# Altium PCB ArduinoUnoShield.PcbDoc
Units mm, origin at the board's own origin, x right, y up, seen from the top; angles counter-clockwise.
Board outline 68.58 x 53.34 mm, 2 copper layers (Top Layer, Bottom Layer); 49 components, 24 nets, 147 pads, 26 vias.
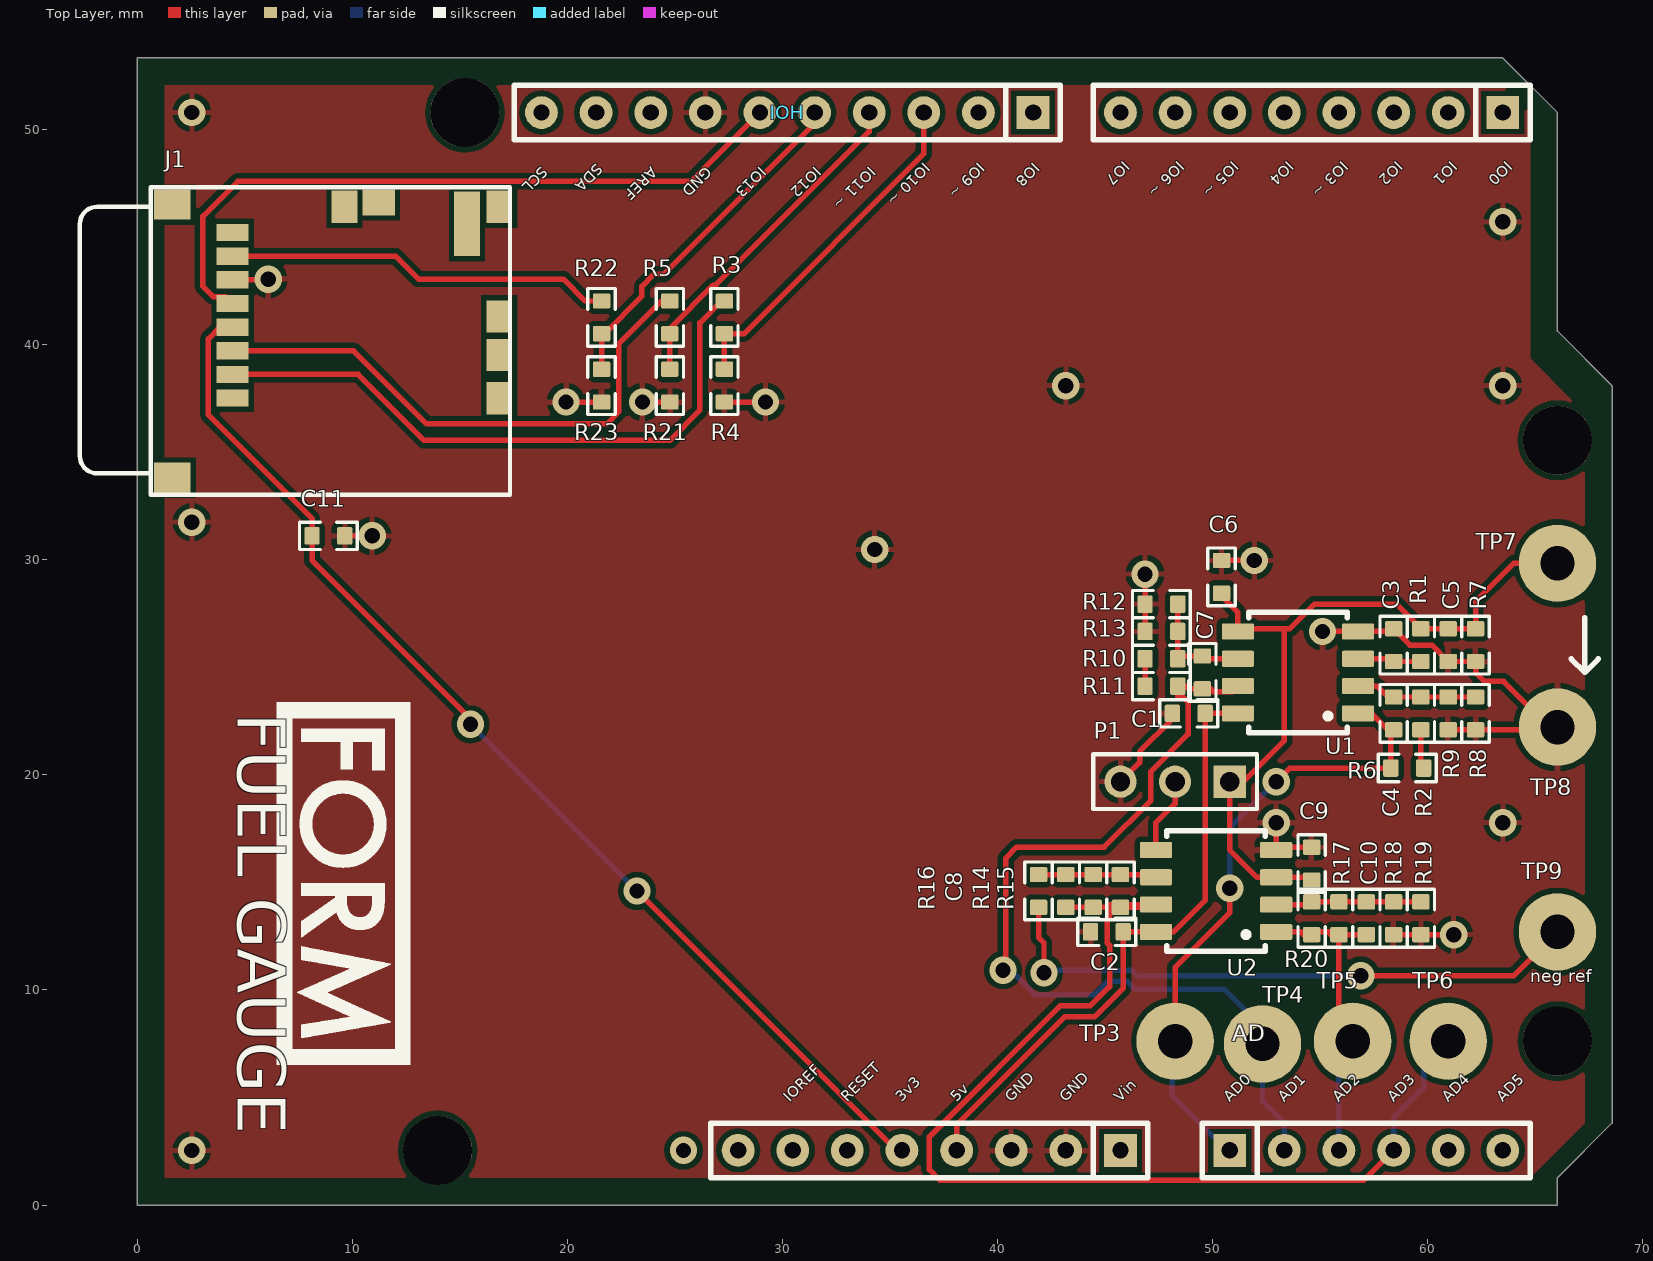
[diagram p0: Top Layer view]
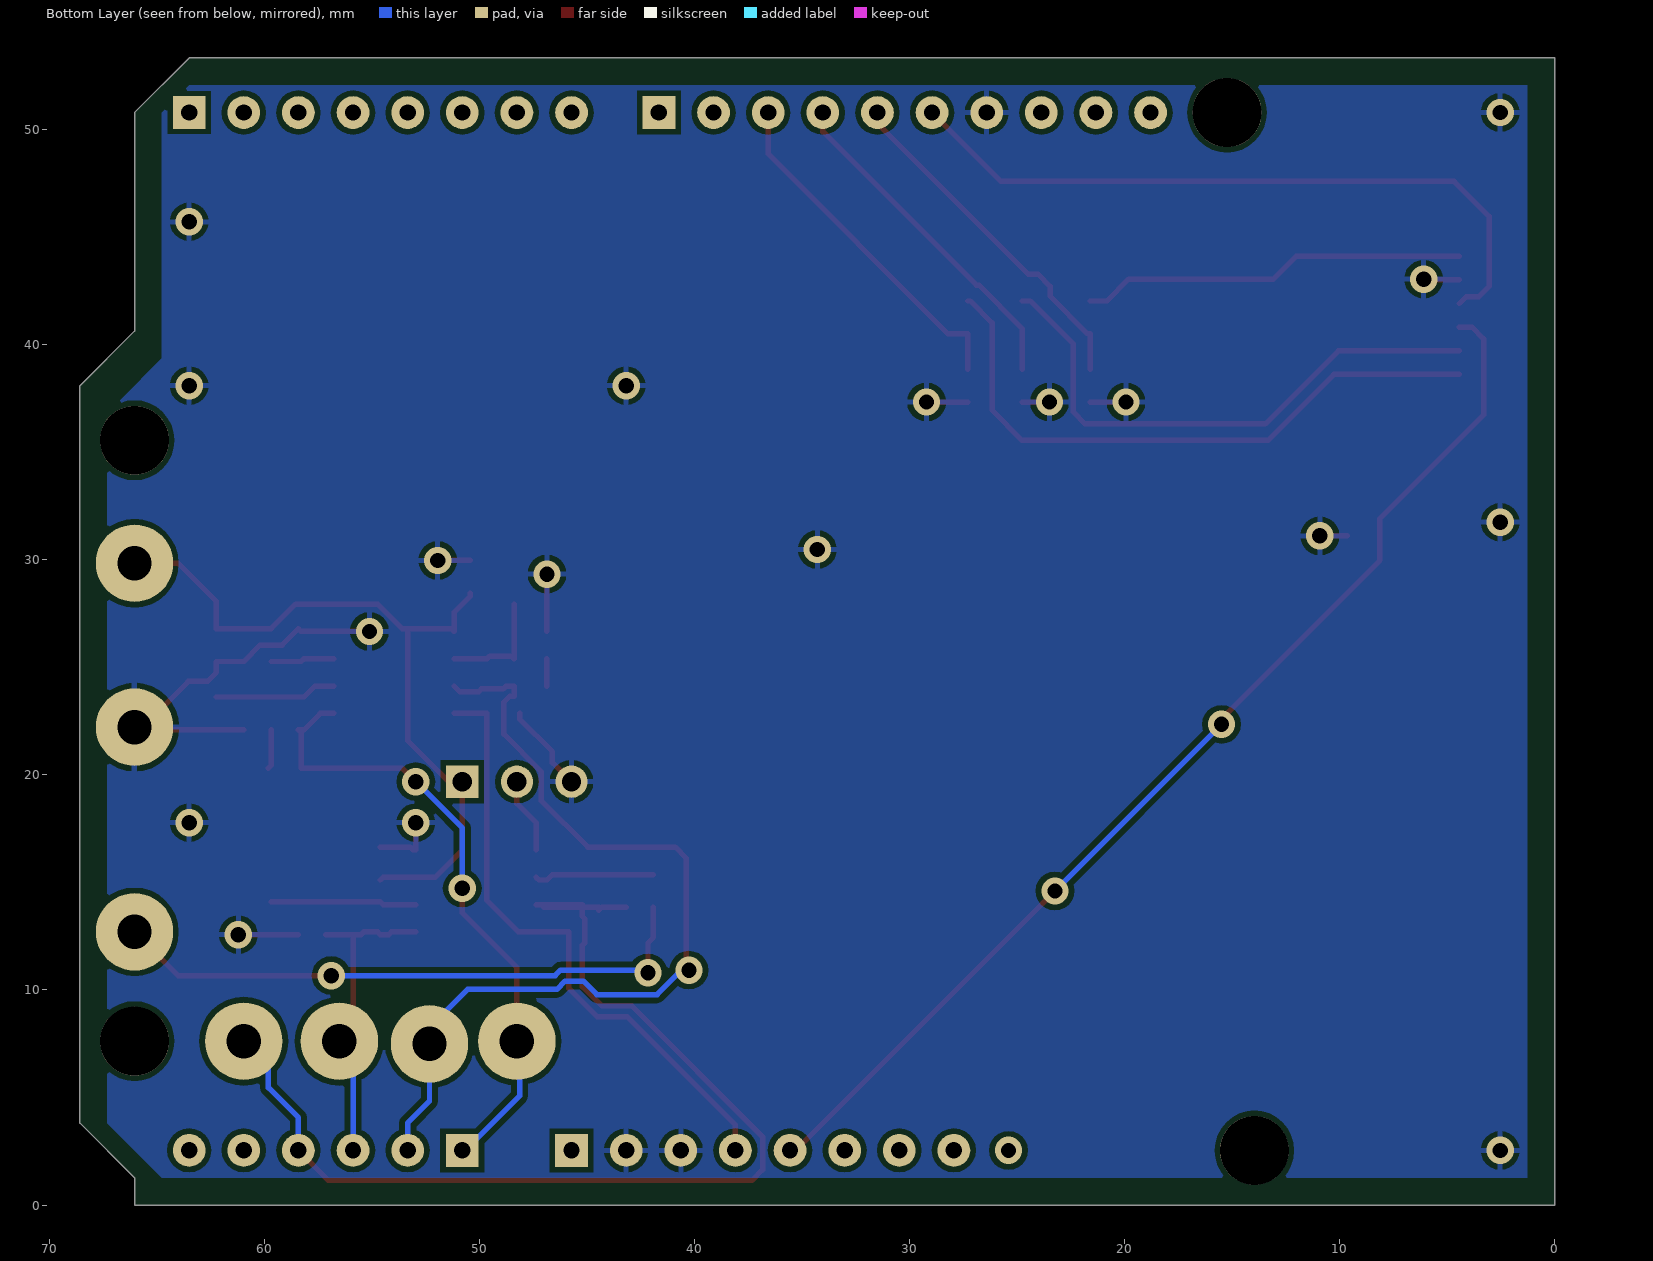
[diagram p1: Bottom Layer view, seen from below]

## Layer stack, top to bottom
Top Solder: solder mask 0.0102, Solder Resist, Dk 3.5
Top Layer: signal copper 0.0356
Dielectric1: dielectric 0.32, FR-4, Dk 4.8
Bottom Layer: signal copper 0.0356
Bottom Solder: solder mask 0.0102, Solder Resist, Dk 3.5

## Board outline
0,0 0,53.34 63.5,53.34 66.04,50.8 66.04,40.64 68.58,38.1 68.58,3.81 66.04,1.27 66.04,0

## Design rules (kind name [scope] priority, off if disabled: settings)
Clearance [All] p1: gap=0.254
PolygonConnect [All] p1: connectstyle=Relief reliefconductorwidth=0.254 reliefentries=4 polygonreliefangle="90 Angle" airgapwidth=0.254
RoutingVias [All] p1: holewidth=0.711 width=1.27 viastyle="Through Hole" minholewidth=0.711 minwidth=1.27 maxholewidth=0.711 maxwidth=1.27
SilkToSolderMaskClearance SilkscreenOverComponentPads [IsPad] p1: minsilkscreentomaskgap=0.254 clearancetoexposedcopper=TRUE
SolderMaskExpansion [All] p1: expansion=0.102
UnpouredPolygon [All] p1: allowunpoured=FALSE
Width [All] p1: maxlimit=0.254 minlimit=0.254 preferedwidth=0.254
28 further rules are at their usual default settings.

## Components (designator, comment, footprint, x,y, rotation, side; value= is the part's Value field where it differs from the comment)
AD "AD" "Header 6x1 8.5mm" 50.8,2.54 r0 top locked
C1 "CAP0603" 0603CAP 48.895,22.86 r0 top
C2 "CAP0603" 0603CAP 45.085,12.7 r0 top
C3 "CAP0603" 0603CAP 58.42,26.035 r90 top
C4 "CAP0603" 0603CAP 58.42,22.86 r270 top
C5 "CAP0603" 0603CAP 60.96,26.035 r270 top
C6 "CAP0603" 0603CAP 50.419,29.21 r90 top
C7 "CAP0603" 0603CAP 49.53,24.765 r270 top
C8 "CAP0603" 0603CAP 43.18,14.605 r270 top
C9 "CAP0603" 0603CAP 54.61,15.875 r90 top
C10 "CAP0603" 0603CAP 57.15,13.335 r270 top
C11 "CAP0603" 0603CAP 8.89,31.115 r180 top
IOH "IOH" "Header 10x1 8.5mm" 41.656,50.8 r180 top locked
IOL "IOL" "Header 8x1 8.5mm" 63.5,50.8 r180 top locked
J1 "MicroSD" "micro SD" 0.635,33.02 r90 top
P1 "Header 3" HDR1X3 50.8,19.685 r180 top
POWER "POWER_UNO" "Header 8x1 8.5mm" 45.72,2.54 r180 top locked
R1 "RES_STANDARD" RES0603 59.69,26.035 r270 top
R2 "RES_STANDARD" RES0603 59.69,22.86 r90 top
R3 "RES_STANDARD" RES0603 27.305,41.275 r90 top
R4 "RES_STANDARD" RES0603 27.305,38.1 r90 top
R5 "RES_STANDARD" RES0603 24.765,41.275 r90 top
R6 "RES_STANDARD" RES0603 59.055,20.32 r0 top
R7 "RES_STANDARD" RES0603 62.23,26.035 r90 top
R8 "RES_STANDARD" RES0603 62.23,22.86 r90 top
R9 "RES_STANDARD" RES0603 60.96,22.86 r90 top
R10 "RES_STANDARD" RES0603 47.625,25.4 r0 top
R11 "RES_STANDARD" RES0603 47.625,24.13 r180 top
R12 "RES_STANDARD" RES0603 47.625,27.94 r0 top
R13 "RES_STANDARD" RES0603 47.625,26.67 r0 top
R14 "RES_STANDARD" RES0603 44.45,14.605 r90 top
R15 "RES_STANDARD" RES0603 45.72,14.605 r90 top
R16 "RES_STANDARD" RES0603 41.91,14.605 r270 top
R17 "RES_STANDARD" RES0603 55.88,13.335 r90 top
R18 "RES_STANDARD" RES0603 58.42,13.335 r90 top
R19 "RES_STANDARD" RES0603 59.69,13.335 r90 top
R20 "RES_STANDARD" RES0603 54.61,13.335 r90 top
R21 "RES_STANDARD" RES0603 24.765,38.1 r90 top
R22 "RES_STANDARD" RES0603 21.59,41.275 r90 top
R23 "RES_STANDARD" RES0603 21.59,38.1 r90 top
TP3 "TESTPOINT_1.6MM" TESTPOINT_1.6MM 48.26,7.62 r90 top
TP4 "TESTPOINT_1.6MM" TESTPOINT_1.6MM 52.324,7.493 r90 top
TP5 "TESTPOINT_1.6MM" TESTPOINT_1.6MM 56.515,7.62 r90 top
TP6 "TESTPOINT_1.6MM" TESTPOINT_1.6MM 60.96,7.62 r90 top
TP7 "TESTPOINT_1.6MM" TESTPOINT_1.6MM 66.04,29.845 r90 top
TP8 "TESTPOINT_1.6MM" TESTPOINT_1.6MM 66.04,22.225 r90 top
TP9 "TESTPOINT_1.6MM" TESTPOINT_1.6MM 66.04,12.7 r90 top
U1 "OPA2335" SO8 53.975,24.765 r180 top
U2 "OPA2335" SO8 50.165,14.605 r180 top

## Footprints (in the part's own frame and the unit in brackets; to place one, negate y for a bottom-side part, rotate by r counter-clockwise, add the part's x,y. Pads: shape width x height; smd on the part's side, far side on the other; paste and mask are expansions set on the pad)
0603CAP [mil] "0603cap"
  rrect20% 28x32 smd mask+0: 1(-30,0) 2(30,0)
  silkscreen extent -53,-25 53,25, body extent -31,-16 31,16, height 20
HDR1X3 [mm] "Connector; Header; 3 Position"
  rect 1.5x1.5 hole 0.9: 1(0,0)
  round 1.5 hole 0.9: 2(2.54,0) 3(5.08,0)
  silkscreen extent -1.27,-1.27 6.35,1.27
"Header 6x1 8.5mm" [mil] "Stackable 6 pin header"
  rect 60x60 hole 30: 1(0,0)
  round 60 hole 30: 2(100,0) 3(200,0) 4(300,0) 5(400,0) 6(500,0)
  silkscreen extent -50,-50 550,50, body extent -50,-50 550,50, height 335
"Header 8x1 8.5mm" [mil] "Stackable 8 pin header"
  rect 60x60 hole 30: 1(0,0)
  round 60 hole 30: 2(100,0) 3(200,0) 4(300,0) 5(400,0) 6(500,0) 7(600,0) 8(700,0)
  silkscreen extent -50,-50 750,50, body extent -50,-50 750,50, height 335
"Header 10x1 8.5mm" [mil] "Stackable 10 pin header"
  rect 60x60 hole 30: 1(0,0)
  round 60 hole 30: 2(100,0) 3(200,0) 4(300,0) 5(400,0) 6(500,0) 7(600,0) 8(700,0) 9(800,0) 10(900,0)
  silkscreen extent -50,-50 950,50, body extent -50,-50 950,50, height 335
"micro SD" [mm] "Molex 502570 - http://www.molex.com/pdm_docs/sd/5025700893_sd.pdf"
  rect 0.8x1.5 smd: 1(4.5,-3.8) 2(5.6,-3.8) 3(6.7,-3.8) 4(7.8,-3.8) 5(8.9,-3.8) 6(10,-3.8) 7(11.1,-3.8) 8(12.2,-3.8)
  rect 1.2x1.5 smd: 9(13.6,-10.6)
  rect 1.5x1.2 smd: 10(6.5,-16.2) 13(4.5,-16.2) 14(13.4,-16.2) 15(8.3,-16.2) 17(13.4,-9)
  rect 1.4x1.7 smd: 11(0.8,-1) 12(13.5,-1)
  rect 3x1.2 smd: 16(12.6,-14.7)
  silkscreen extent 0,-16.7 14.3,3.3
RES0603 [mil] "RES0603"
  rrect20% 28x32 smd mask+0: 1(-30,0) 2(30,0)
  silkscreen extent -53,-25 53,25, body extent -30,-15 30,15, height 22
SO8 [mm] "SO8 (S8)"
  rrect20% 1.5x0.75 smd mask+0: 1(-2.794,1.905) 2(-2.794,0.635) 3(-2.794,-0.635) 4(-2.794,-1.905) 5(2.794,-1.905) 6(2.794,-0.635) 7(2.794,0.635) 8(2.794,1.905)
  silkscreen extent -2.29,-2.79 2.29,2.79, body extent -2.16,-2.67 2.16,2.67, height 1.76
TESTPOINT_1.6MM [mm] "Testpoint 1.6mm"
  round 3.6 hole 1.6 paste+0 mask+0: 1(0,0)
  body extent -0.81,-0.81 0.81,0.81, height 8.1

## Part data
C1 C2 C3 C4 C5 C6 C7 C8 C9 C10 C11: library part 185, "Ceramic Capacitor SMD 0603"
P1: "Header, 3-Pin"
R1 R2 R3 R4 R5 R6 R7 R8 R9 R10 R11 R12 R13 R14 R15 R16 R17 R18 R19 R20 R21 R22 R23: library part 276, "Resistor 0603 SMD"
TP3 TP4 TP5 TP6 TP7 TP8 TP9: library part 203, "Testpoint"
U1 U2: library part 104, "Dual and Quad 75 MHz GBW Rail-to-Rail I/O Operational"

## Free pads (board coordinates)
  round 3.2 hole 3.2: 0(13.97,2.54) 0(15.24,50.8) 0(66.04,7.62) 0(66.04,35.56)

## Via types
v1: diameter 1.27, hole 0.711, Top Layer to Bottom Layer, 26 vias

## Nets (pads, with @x,y where several pads share a name; then routed paths per layer and width w, separated by ;. In a path a pad name is that pad's centre, name@x,y a point inside that pad or via, vN(x,y) a via of type N, cw(c..) or ccw(c..) an arc to the next point about the centre after c; other vN are vias at no path point)
3.3V: C11.2 J1.4 POWER.5 | length 52.6
  Top Layer w0.254: J1.4 3.846,40.82 3.304,40.278 3.304,36.739 8.128,31.915 C11.2 8.128,29.972 15.494,22.606 v1(15.494,22.352) ; v1(23.241,14.605) 35.306,2.54 POWER.5
  Bottom Layer w0.254: v1(15.494,22.352) v1(23.241,14.605)
5V: C1.2 C2.2 POWER.4 U1.8 U2.8 | length 28.8
  Top Layer w0.254: POWER.4 38.1,3.727 43.136,8.763 44.533,8.763 45.847,10.077 C2.2 U2.8 48.197,12.7 49.657,14.16 C1.2 U1.8
AD0: AD.1 C4.2 R6.1 TP3.1 U1.1 | length 29.7
  Top Layer w0.254: TP3.1 48.26,11.049 50.8,13.589 v1(50.8,14.732) ; v1(52.959,19.685) 53.594,20.32 R6.1 58.293,21.971 C4.2 58.166,22.098 57.404,22.86 U1.1
  Bottom Layer w0.254: TP3.1 48.133,7.493 48.133,5.08 50.673,2.54 AD.1 ; v1(50.8,14.732) 50.8,17.526 v1(52.959,19.685)
AD1: AD.2 C7.2 R11.1 TP4.1 U1.7 | length 42.3
  Top Layer w0.254: v1(40.259,10.922) 40.386,11.049 40.386,16.129 40.894,16.637 44.958,16.637 47.129,18.808 47.129,20.153 48.87,21.894 48.87,23.383 48.605,23.647 48.387,23.647 R11.1 48.768,24.13 48.895,24.003 C7.2 49.911,24.003 50.038,23.876 50.927,23.876 U1.7
  Bottom Layer w0.254: v1(40.259,10.922) 40.6,10.922 41.743,9.779 44.537,9.779 45.172,10.414 46.014,10.414 46.395,10.033 50.546,10.033 52.324,8.255 TP4.1 52.324,4.826 53.34,3.81 AD.2
AD2: AD.3 C10.2 R17.1 R20.1 TP5.1 U2.1 | length 14.9
  Top Layer w0.254: U2.1 54.102,12.7 54.229,12.573 R20.1 54.737,12.7 55.372,12.7 55.499,12.573 R17.1 ; TP5.1 55.88,8.255 R17.1 ; C10.2 R17.1
  Bottom Layer w0.254: AD.3 55.88,6.985 TP5.1
AD3: AD.4 C8.2 R14.1 R15.1 TP6.1 U2.7 | length 53.1
  Top Layer w0.254: C8.2 44.323,13.843 44.45,13.716 R14.1 45.187,13.843 ; U2.7 U2.7@47.117,13.97 ; AD.4 57.023,1.143 37.338,1.143 36.83,1.651 36.83,3.175 42.926,9.271 44.323,9.271 45.212,10.16 45.212,12.076 45.11,12.177 45.11,13.324 45.212,13.426 45.212,13.716 45.187,13.741 45.187,13.843 ; TP6.1@59.599,7.62 TP6.1 ; 45.187,13.843 45.593,13.843 R15.1@45.72,13.97 ; 45.187,13.843 45.187,13.945 45.212,13.97 R15.1@45.72,13.97 ; R15.1@45.72,13.97 U2.7@47.117,13.97 ; R15.1@45.72,13.97 R15.1 46.99,13.843 U2.7@47.117,13.97
  Bottom Layer w0.254: AD.4 58.42,4.064 59.817,5.461 59.817,6.35 60.96,7.493 TP6.1
CS: J1.2 R3.2 | length 29.2
  Top Layer w0.254: J1.2 10.275,38.62 13.335,35.56 24.765,35.56 26.162,36.957 26.162,41.021 27.178,42.037 R3.2
GND: C1.1 C2.1 C3.2 C5.2 C6.2 C9.2 C11.1 IOH.7 J1.6 P1.3 POWER.2 POWER.3 R4.1 R7.1 R8.1 R9.1 R12.1 R13.1 R18.1 R19.1 R21.1 R23.1 TP8.1 U1.4 U2.4 | length 40.2
  Top Layer w0.254: J1.6 6.063,43.02 v1(6.096,43.053) ; C11.1 v1(10.922,31.115) ; v1(19.939,37.338) R23.1 ; v1(23.495,37.338) R21.1 ; R4.1 v1(29.21,37.338) ; P1.3 46.609,20.574 46.609,21.082 48.133,22.606 C1.1 ; R13.1 R12.1 v1(46.863,29.337) ; C6.2 v1(51.943,29.972) ; v1(52.959,17.78) U2.4 53.086,16.51 53.213,16.637 C9.2 ; v1(55.118,26.67) U1.4 58.293,26.67 C3.2 59.182,26.035 60.198,26.035 C5.2 R7.1 62.23,24.765 62.643,24.352 63.532,24.352 65.659,22.225 TP8.1 65.913,22.098 R8.1 R9.1 ; R18.1 R19.1 v1(61.214,12.573)
  other v1: 2.54,2.54 63.5,17.78 34.29,30.48 2.54,31.75 43.18,38.1 63.5,38.1 63.5,45.72 2.54,50.8
IO10: IOH.3 R3.1 R4.2 | length 16.3
  Top Layer w0.254: R4.2 R3.1 28.205,40.513 36.576,48.884 IOH.3
IO11: IOH.4 R5.1 R21.2 | length 15.8
  Top Layer w0.254: R21.2 R5.1 24.765,40.756 26.782,42.774 26.899,42.774 34.036,49.911 IOH.4
IO12: IOH.5 R22.1 R23.2 | length 16.4
  Top Layer w0.254: R23.2 R22.1 21.717,40.513 23.47,42.266 23.47,42.719 24.032,43.282 24.486,43.282 31.496,50.292 IOH.5
IO13: IOH.6 J1.5 | length 32.9
  Top Layer w0.254: J1.5 4.116,42.239 3.527,42.239 3.048,42.718 3.048,45.974 4.675,47.601 25.757,47.601 IOH.6
MOSI0: J1.3 R5.2 | length 26
  Top Layer w0.254: J1.3 10.064,39.72 13.462,36.322 21.833,36.322 22.39,36.879 22.39,40.043 24.384,42.037 R5.2
NetC3_1: C3.1 R1.2 U1.3 | length 3
  Top Layer w0.254: U1.3 58.166,25.4 58.293,25.273 C3.1 R1.2
NetC4_1: C4.1 R2.2 R8.2 R9.2 U1.2 | length 5.7
  Top Layer w0.254: U1.2 57.658,24.13 58.166,23.622 C4.1 R2.2 R9.2 R8.2
NetC5_1: C5.1 C6.1 C9.1 P1.1 R1.1 R7.2 TP7.1 U1.5 U2.3 | length 36.4
  Top Layer w0.254: C6.1 50.419,28.321 51.181,27.559 U1.5 51.308,26.797 53.34,26.797 ; C9.1 54.483,15.24 U2.3 52.07,15.24 50.8,16.51 P1.1 51.435,19.685 53.34,21.59 53.34,26.797 ; TP7.1@66.04,29.464 TP7.1 64.008,29.845 62.23,28.067 R7.2 C5.1 R1.1 58.547,27.94 54.737,27.94 53.594,26.797 53.34,26.797
NetC7_1: C7.1 R10.2 R12.2 R13.2 U1.6 | length 5.4
  Top Layer w0.254: R12.2 R13.2 R10.2 48.514,25.527 C7.1 49.657,25.4 U1.6
NetC8_1: C8.1 R14.2 R15.2 R16.1 U2.6 | length 5.6
  Top Layer w0.254: R16.1 C8.1 R14.2 R15.2 46.609,15.367 46.863,15.113 47.244,15.113 U2.6
NetC10_1: C10.1 R17.2 R18.2 R19.2 R20.2 U2.2 | length 6.8
  Top Layer w0.254: U2.2 54.483,13.97 R20.2 R17.2 C10.1 R18.2 R19.2
NetJ1_7: J1.7 R22.2 | length 18
  Top Layer w0.254: J1.7 12.014,44.12 13.081,43.053 19.812,43.053 20.828,42.037 R22.2
NetP1_2: P1.2 U2.5 | length 3.5
  Top Layer w0.254: U2.5 47.371,17.78 48.26,18.669 P1.2
NetR2_1: R2.1 R6.2 | length 1.8
  Top Layer w0.254: R2.1 59.69,20.447 R6.2
NetR10_1: R10.1 R11.2 | length 1.3
  Top Layer w0.254: R11.2 R10.1
NetR16_2: R16.2 TP9.1 | length 28
  Top Layer w0.254: R16.2 41.91,12.446 42.164,12.192 v1(42.164,10.795) ; v1(56.896,10.668) 64.008,10.668 TP9.1
  Bottom Layer w0.254: v1(42.164,10.795) 42.291,10.922 46.224,10.922 46.478,10.668 v1(56.896,10.668)
pads on no net: AD.5 AD.6 IOH.1 IOH.2 IOH.8 IOH.9 IOH.10 IOL.1 IOL.2 IOL.3 IOL.4 IOL.5 IOL.6 IOL.7 IOL.8 J1.1 J1.8 J1.9 J1.10 J1.11 J1.12 J1.13 J1.14 J1.15 J1.16 J1.17 POWER.1 POWER.6 POWER.7 POWER.8
copper on no net:
  other v1: 25.4,2.54

## Polygon pours and split planes (outlines as drawn)
GND on Bottom Layer "GND" (solid, remove dead copper, pour order 2): 1.27,52.07 63.5,52.07 64.77,50.8 64.77,39.37 67.31,36.83 67.31,3.81 64.77,1.27 1.27,1.27 1.27,52.07
GND on Top Layer "GND" (solid, remove dead copper, pour order 4): 1.27,52.07 63.5,52.07 64.77,50.8 64.77,39.37 67.31,36.83 67.31,3.81 64.77,1.27 1.27,1.27 1.27,52.07

## Silkscreen, mask and mechanical layers (free items; w line width, h text height)
Top Overlay:
  drawing of 3183 lines, arcs and shapes, not listed
  text "IO7" at 45.847,48.588 h0.51 r225
  text "IO6 ~" at 48.387,48.588 h0.51 r225
  text "IO5 ~" at 50.927,48.588 h0.51 r225
  text "IO4" at 53.467,48.588 h0.51 r225
  text "IO3 ~" at 56.007,48.588 h0.51 r225
  text "IO2" at 58.547,48.588 h0.51 r225
  text "IO1" at 61.087,48.588 h0.51 r225
  text "IO0" at 63.627,48.588 h0.51 r225
  text "IO10 ~" at 36.576,48.514 h0.51 r225
  text "IO9 ~" at 39.116,48.514 h0.51 r225
  text "IO8" at 41.656,48.514 h0.51 r225
  text "SDA" at 21.336,48.461 h0.51 r225
  text "SCL" at 18.796,48.334 h0.51 r225
  text "AREF" at 23.876,48.334 h0.51 r225
  text "GND" at 26.416,48.334 h0.51 r225
  text "IO13" at 28.956,48.334 h0.51 r225
  text "IO12" at 31.496,48.334 h0.51 r225
  text "IO11 ~" at 34.036,48.334 h0.51 r225
  text "FUEL GAUGE" at 3.937,22.86 h3.81 r270
  text "neg ref" at 64.77,10.16 h1
  text "IOREF" at 30.353,4.752 h0.51 r45
  text "RESET" at 33.02,4.752 h0.51 r45
  text "3v3" at 35.56,4.752 h0.51 r45
  text "5v" at 38.1,4.752 h0.51 r45
  text "GND" at 40.64,4.752 h0.51 r45
  text "GND" at 43.18,4.752 h0.51 r45
  text "Vin" at 45.72,4.752 h0.51 r45
  text "AD0" at 50.8,4.752 h0.51 r45
  text "AD1" at 53.34,4.752 h0.51 r45
  text "AD2" at 55.88,4.752 h0.51 r45
  text "AD3" at 58.42,4.752 h0.51 r45
  text "AD4" at 60.96,4.752 h0.51 r45
  text "AD5" at 63.5,4.752 h0.51 r45
  text "RESET" at 32.893,-63.881 h0.51 r45
  text "3v3" at 35.433,-63.881 h0.51 r45
  text "5v" at 37.973,-63.881 h0.51 r45
  text "GND" at 40.513,-63.881 h0.51 r45
  text "GND" at 43.053,-63.881 h0.51 r45
  text "Vin" at 45.593,-63.881 h0.51 r45
Mechanical 1:
  circle w0.127: c15.24,50.8 r1.6
  circle w0.127: c66.04,7.62 r1.6
  circle w0.127: c13.97,2.54 r1.6
  circle w0.127: c66.04,35.56 r1.6
  lines w0.127: 0,0 0,53.34 63.5,53.34 66.04,50.8 66.04,40.64 68.58,38.1 68.58,3.81 66.04,1.27 66.04,0 0,0